# EAGLE board icetube_main_transistor_RevB (EAGLE 6.5.0)
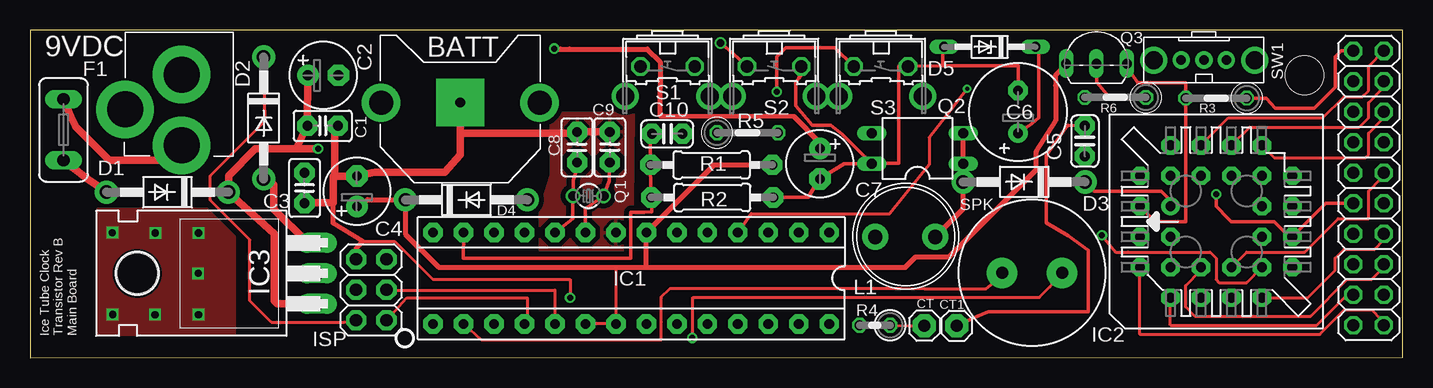
[diagram p0: board, top side]
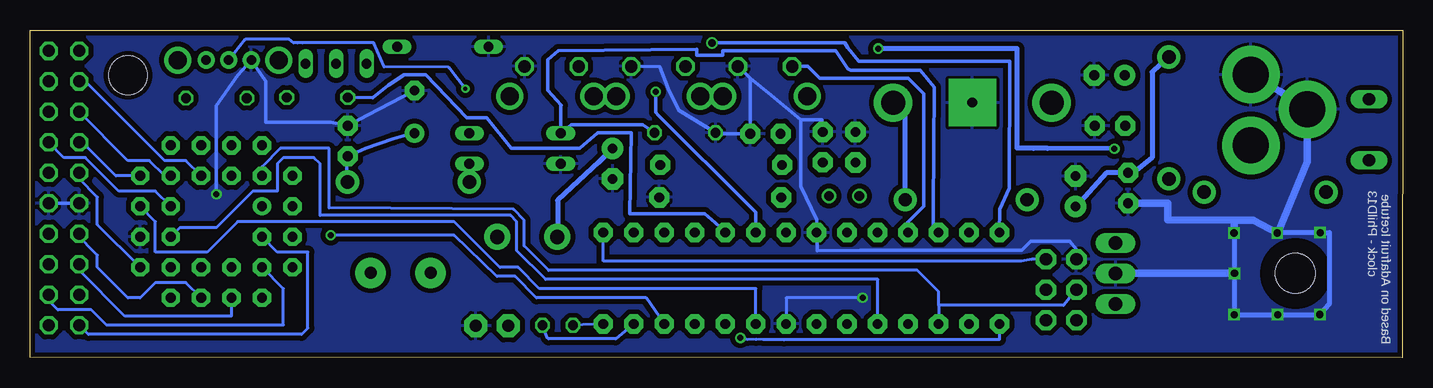
[diagram p1: board, bottom side, seen from below]

Size 114.38 x 27.33 mm. Coordinates in mm from the lower left corner, seen from the top.
Outline: 0.01,0 114.38,0.06
Outline: 114.38,0.06 114.38,27.33 0,27.33 0.01,0
Outline: 0.01,0 114.38,0.06
Copper layers (1*16): Top 0.0356mm / dielectric 1.5011mm / Bottom 0.0356mm
Design rules "osh_boards": minimum track width 6mil, minimum drill 13mil, track to track 6mil, track to pad 6mil, pad to pad 6mil, via to via 6mil, smd to smd 6mil, copper to edge 15mil, drill to drill 6mil, minimum pad ring 7mil, minimum via ring 7mil, stop-mask expansion 4mil, vias tented up to drill 0mil, thermal gap 10mil
Holes 3.2 mm at 106.21,23.56

## Footprints (pad centres in the part's own frame; a part is rotated, then mirrored left to right if it is on the bottom)
CR1220-THM = drill 2 pad 3.175: +1 -6.604,0; +2 6.604,0 | drill 0.8 pad 3.962 square: - 0,0
C025-025X050 = drill 0.813 pad 1.676 octagon: 1 -1.27,0; 2 1.27,0
E2,5-6 = drill 0.813 pad 1.778: + -1.27,0 | drill 0.813 pad 1.778 octagon: - 1.27,0
C025-024X044 = drill 0.813 pad 1.676 octagon: 1 -1.27,0; 2 1.27,0
E3,5-8 = drill 0.813 pad 1.6: + -1.778,0 | drill 0.813 pad 1.6 octagon: - 1.778,0
1X01 = drill 1.016 pad 1.93 octagon: 1 0,0
DO41-10 = drill 1.118 pad 1.93: A 5.08,0; C -5.08,0
DO34Z7 = drill 0.813 long: A 3.81,0; C -3.81,0
TE5 = drill 1.016 long: 1 -2.54,0; 2 2.54,0
DIL28/3 = drill 0.813 pad 1.6 octagon: 1 -16.51,-3.81; 2 -13.97,-3.81; 3 -11.43,-3.81; 4 -8.89,-3.81; 5 -6.35,-3.81; 6 -3.81,-3.81; 7 -1.27,-3.81; 8 1.27,-3.81; 9 3.81,-3.81; 10 6.35,-3.81; 11 8.89,-3.81; 12 11.43,-3.81; 13 13.97,-3.81; 14 16.51,-3.81; 15 16.51,3.81; 16 13.97,3.81; 17 11.43,3.81; 18 8.89,3.81; 19 6.35,3.81; 20 3.81,3.81; 21 1.27,3.81; 22 -1.27,3.81; 23 -3.81,3.81; 24 -6.35,3.81; 25 -8.89,3.81; 26 -11.43,3.81; 27 -13.97,3.81; 28 -16.51,3.81
PLCC-S28 = drill 0.813 pad 1.524: 1 1.27,3.81 | drill 0.813 pad 1.524 octagon: 2 -1.27,6.35; 3 -1.27,3.81; 4 -3.81,6.35; 5 -6.35,3.81; 6 -3.81,3.81; 7 -6.35,1.27; 8 -3.81,1.27; 9 -6.35,-1.27; 10 -3.81,-1.27; 11 -6.35,-3.81; 12 -3.81,-6.35; 13 -3.81,-3.81; 14 -1.27,-6.35; 15 -1.27,-3.81; 16 1.27,-6.35; 17 1.27,-3.81; 18 3.81,-6.35; 19 6.35,-3.81; 20 3.81,-3.81; 21 6.35,-1.27; 22 3.81,-1.27; 23 6.35,1.27; 24 3.81,1.27; 25 6.35,3.81; 26 3.81,6.35; 27 3.81,3.81; 28 1.27,6.35
TO220H = drill 1.118 long: 1 -2.54,-10.16; 2 0,-10.16; 3 2.54,-10.16 | hole 3.302: 0,4.826
2X03 = drill 1.016 pad 1.676 octagon: 1 -2.54,-1.27; 2 -2.54,1.27; 3 0,-1.27; 4 0,1.27; 5 2.54,-1.27; 6 2.54,1.27
PJ-102A = drill 3 pad 4.8: RING 0.1,-3.39; RING_SW -4.6,-6.29; TIP 0.1,-9.29
2X10 = drill 1.016 octagon: 1 -11.43,-1.27; 2 -11.43,1.27; 3 -8.89,-1.27; 4 -8.89,1.27; 5 -6.35,-1.27; 6 -6.35,1.27; 7 -3.81,-1.27; 8 -3.81,1.27; 9 -1.27,-1.27; 10 -1.27,1.27; 11 1.27,-1.27; 12 1.27,1.27; 13 3.81,-1.27; 14 3.81,1.27; 15 6.35,-1.27; 16 6.35,1.27; 17 8.89,-1.27; 18 8.89,1.27; 19 11.43,-1.27; 20 11.43,1.27
6000 = drill 1.2 pad 2.184: 1 -2.5,0; 2 2.5,0
TC26V = drill 0.813: 1 -1.27,0; 2 1.27,0
DIL04 = drill 0.813 long: 1 -1.27,-3.81; 2 1.27,-3.81; 3 1.27,3.81; 4 -1.27,3.81
TO92-EBC-OVAL = drill 0.813 long: B 0,-1.27; C 2.54,-1.27; E -2.54,-1.27
0207/10 = drill 0.813 pad 1.676 octagon: 1 -5.08,0; 2 5.08,0
0207/5V = drill 0.813 octagon: 1 -2.54,0; 2 2.54,0
0207/2V = drill 0.813 octagon: 1 -1.27,0; 2 1.27,0
B3F-31XX = drill 1.016 octagon: 1 -2.261,-1.245; 2 2.261,-1.245 | drill 1.499 pad 2.159: 3 -3.505,1.245; 4 3.505,1.245
PS12 = drill 1 pad 2.54: P$1 -2.5,0; P$2 2.5,0
OS102011MA1Q = drill 0.8 pad 1.422: 1 -1.873,0; 2 0,0; 3 1.9,0 | drill 1.5 pad 2.184: MT1 -4.227,0; MT2 4.2,0

## Placement (x,y rotation side)
BATT  CR1220  [CR1220-THM]  35.86,21.27 0 top
C1  0.1uF/50V  [C025-025X050]  24.39,19.34 0 top
C2  47uF/25V  [E2,5-6]  24.43,23.56 0 top
C3  0.1uF/50V  [C025-025X050]  22.87,14.16 270 top
C4  220uF/6V  [E2,5-6]  27.25,13.89 90 top
C5  0.1uF/100V  [C025-024X044]  87.9,18.07 90 top
C6  33uF/100V  [E3,5-8]  82.34,20.51 90 top
C7  47uF/25V  [E2,5-6]  65.83,16.19 270 top
C8  10pf  [C025-025X050]  45.59,17.56 90 top
C9  10pf  [C025-025X050]  48.31,17.56 90 top
C10  0.1uF/50V  [C025-024X044]  53.1,18.68 0 top
CT  PC4  [1X01]  74.52,2.69 0 top
CT1  GND  [1X01]  77.22,2.68 0 top
D1  SB160 60V/1A  [DO41-10]  11.45,13.81 180 top
D2  1N5817/20v  [DO41-10]  19.47,20 270 top
D3  SB160 60V/1A  [DO41-10]  82.85,14.67 180 top
D4  1N5817/20v  [DO41-10]  36.36,13.18 0 top
D5  1N5264B/60V  [DO34Z7]  79.97,25.92 180 top
F1  FUSETE5  [TE5]  2.79,19.01 270 top
IC1  ATMEGA328P  [DIL28/3]  50.1,6.64 180 top
IC2  MAX6921  [PLCC-S28]  98.85,11.36 90 top
IC3  7805T  [TO220H]  13.76,7.05 90 top
ISP  ISP  [2X03]  28.44,5.68 90 top
J1  2.1MMJACKTHM  [PJ-102A]  12.53,27.01 0 top
JP1  female  [2X10]  111.55,14.16 270 top
L1  2200uH  [6000]  72.94,10.09 0 top
Q1  32.768 khz  [TC26V]  46.53,13.5 0 top
Q2  IRFD110  [DIL04]  73.96,17.46 90 top
Q3  2N2907  [TO92-EBC-OVAL]  88.87,25.79 0 top
R1  270k  [0207/10]  56.79,16.09 180 top
R2  100k  [0207/10]  56.85,13.37 0 top
R3  11 ohm  [0207/5V]  98.85,21.65 180 top
R4  5.6K  [0207/2V]  70.4,2.73 180 top
R5  10k  [0207/5V]  59.79,18.76 0 top
R6  1K  [0207/5V]  90.44,21.71 180 top
S1  Menu  [B3F-31XX]  53.13,23.05 180 top
S2  Set  [B3F-31XX]  62.02,23.05 180 top
S3  +  [B3F-31XX]  70.91,23.05 180 top
SPK  PS1240  [PS12]  83.5,7.1 180 top
SW1  ALARM  [OS102011MA1Q]  97.83,24.83 180 top

## Library data of the parts
BATT D1 J1 Q3 SW1 = adafruit
C1-C4 C7-C9 R1 R2 = minimidi
C5 C6 C10 = rcl-ez
CT CT1 SPK = ybox2
D2-D4 L1 = usbbuck
D5 = diode
F1 = fuse; MF: .300A; OC_FARNELL: unknown; OC_NEWARK: unknown
IC1 = avr
IC2 Q2 = vfd
IC3 = linear
ISP = pinhead-ez
JP1 = pinhead
Q1 = crystal
R3-R6 = resistor
S1-S3 = switch-omron; MPN: B3F-3100; OC_FARNELL: 959704; OC_NEWARK: 36M3582

## Nets
+9V: C1.1 C2.+ C7.+ D1.C IC3.1 L1.1
+UB: C5.1 C6.+ D3.C D5.C IC2.1
ALARM: IC1.4 SW1.2
BATTSNS: C10.1 IC1.13 R1.2 R2.1
BLANK: IC1.26 IC2.13
BOOST: IC1.12 Q2.3 R5.2
GND: BATT.- C1.2 C2.- C3.2 C4.- C5.2 C6.- C7.- C8.2 C9.2 C10.2 CT1.1 D5.A IC1.8 IC1.22 IC2.14 IC3.2 ISP.6 J1.RING J1.RING_SW JP1.11 JP1.12 Q2.4 R2.2 R5.1 S1.1 S2.1 S3.1 SW1.3
LOAD: IC1.23 IC2.16
MISO: IC1.18 ISP.1
MOSI: IC1.17 IC2.27 ISP.4
N$1: C9.1 IC1.9 Q1.2
N$2: D3.A L1.2 Q2.1 Q2.2
N$3: C8.1 IC1.10 Q1.1
N$4: F1.1 J1.TIP
N$5: D1.A F1.2
N$6: Q3.B R6.1
N$10: BATT.+2 D4.A
N$11: IC1.28 R4.2
N$34: JP1.1 R3.1
N$39: IC2.28 Q3.C R3.2
N$52: CT.1 IC1.27 R4.1
N$53: D2.A IC3.3
RST: IC1.1 ISP.5
SCK: IC1.19 IC2.15 ISP.3
SPKR1: IC1.15 SPK.P$1
SPKR2: IC1.16 SPK.P$2
SWITCH1: IC1.11 S1.2
SWITCH2: IC1.14 S2.2
SWITCH3: IC1.6 S3.2
VCC: C3.1 C4.+ D2.C D4.C IC1.7 IC1.20 IC1.21 ISP.2 Q3.E R1.1
VFD'1: IC2.22 JP1.3
VFD'2: IC2.10 JP1.10
VFD'3: IC2.21 JP1.4
VFD'4: IC2.12 JP1.9
VFD'5: IC2.20 JP1.5
VFD'6: IC2.17 JP1.8
VFD'7: IC2.18 JP1.7
VFD'8: IC2.19 JP1.6
VFD'9: IC2.23 JP1.2
VFD'_A: IC2.3 JP1.19
VFD'_B: IC2.5 JP1.17
VFD'_C: IC2.8 JP1.16
VFD'_D: IC2.9 JP1.13
VFD'_E: IC2.7 JP1.15
VFD'_F: IC2.4 JP1.20
VFD'_G: IC2.6 JP1.18
VFD'_H: IC2.11 JP1.14
VFDPWR: IC1.5 R6.2

## Tracks (layer width: path | path; a pad name or v marks a point on that pad's centre or on a via)
+9V  (via drill 0.5)
  Top 0.406: 43.68,25.97 43.68,25.74 | 43.68,25.74 44.19,25.74 | 44.19,25.74 44.95,25.74 51.46,25.73 52.51,24.66 52.49,20.19 63.65,20.13 65.78,17.99 65.78,17.49 65.81,17.46 C7.+ | v43.68,25.78 43.68,25.74 | 43.68,25.74 44.19,25.74
  Top 0.61: C2.+ C1.1 22.21,17.44 | 22.21,17.44 23.39,17.44 v24.01,17.43 | IC3.1 20.62,4.51 20.36,4.76 20.36,10.35 D1.C 16.55,15.18 18.75,17.42 22.21,17.44
  Bottom 0.254: 70.4,10.1 L1.1
  Bottom 0.406: C7.+ 66.35,16.92 66.92,16.34 70.4,13.12 70.4,10.1 | v24.01,17.43 29.59,17.47 30.76,17.47 32.12,17.49 32.13,18.63 32.13,25.78 v43.68,25.78
+UB
  Top 0.305: D3.C 88.69,13.91 94.28,13.91 95.04,13.14 IC2.1 | D5.C 84.07,25.35 84.07,20.03 83.48,19.52 C6.+
  Bottom 0.254: 88.05,14.54 D3.C 87.98,15.24
  Bottom 0.305: 87.9,14.66 87.98,15.24 87.97,15.93 C5.1 86.4,17.46 84.09,18.25 82.36,18.76 C6.+
ALARM  (via drill 0.33)
  Top 0.254: 60.11,12 64.89,12 65.46,12 71.64,12 74.93,16.09 74.93,18.37 76.72,20.66 v78.09,22.43
  Top 0.305: IC1.4 60.11,12
  Bottom 0.254: SW1.2 96.43,26.55 92.77,26.54 92.4,26.25 92.08,26.25 91.69,26.25 85.72,26.27 84.86,24.25 79.5,24.22 78.99,23.58 v78.09,22.43
BATTSNS
  Top 0.152: 50.08,12.15 50.08,12.13
  Top 0.305: 50.08,12.13 50.08,8.32 36.11,8.32 IC1.13 | 50.08,12.15 51.18,12.15 51.79,12.16 R2.1 51.71,15.68 R1.2 51.71,18.3 C10.1
BLANK  (via drill 0.5)
  Top 0.254: IC2.13 101.39,6.29 99.1,6.29 98.85,6.54 98.85,8.32 98.34,8.83 91.48,8.83 90.47,8.83 89.96,9.46 v89.32,10.22
  Bottom 0.254: IC1.26 63.03,5.02 72.18,5.02 73.96,6.79 75.48,6.79 79.04,10.22 v89.32,10.22
BOOST
  Bottom 0.152: 70.1,21.04 70.15,21.04
  Bottom 0.305: IC1.12 39.11,10.45 39.11,12.41 39.03,22.54 40.2,23.96 45.97,23.96 46.22,24.09 47.24,25.61 56.64,25.61 56.64,25.23 58.8,25.23 58.8,25.74 70.35,25.61 71.24,24.85 71.24,22.31 70.1,21.04 | R5.2 63.32,19.41 67.92,19.41 69.26,19.41 Q2.3 70.15,21.04
GND  (via drill 0.5, 0.6)
  Top 0.152: 25.39,15.16 25.27,15.16 | 22.87,12.91 C3.2 | 70.15,16.22 Q2.4 | 45.59,18.73 C8.2
  Top 0.254: 64.3,24.29 S2.1 64.25,24.32 | v45,5.02 45,6.54 33.57,6.54 30.39,9.71 27.73,9.71
  Top 0.305: JP1.11 107.99,12.89 IC2.14 104.94,10.1 103.67,11.37 100.12,11.37 99.86,11.62 98.85,12.64 v98.85,13.65 | 64.25,24.32 64.26,23.62 64.05,23.3 63.8,22.92 63.8,21.02 65.2,19.41 66.73,19.41 67.7,18.64 Q2.4 67.86,16.19 C7.- 65.81,14.92 65.78,14.95 64.85,13.38 R2.2 | CT1.1 78.86,3.44 79.83,3.83 88.18,3.84 88.2,8.96 86.54,10.16 84.7,11.26 84.7,16.85 85.41,17.9 86.48,19.39 C5.2 | 76.07,24.34 75.95,24.34 S3.1 72.39,24.29 72.39,16.22 70.15,16.22 | 76.07,24.34 82.34,24.34 C6.- | D5.A 76.07,25.22 76.07,24.34
  Top 0.406: ISP.6 27.16,9.05 27.73,9.71 25.27,11.24 25.27,12.91 | 35.86,18.5 35.86,18.73 BATT.-
  Top 0.61: 25.27,15.16 25.27,12.91 22.87,12.91 | C1.2 25.39,18.6 25.39,15.16 C4.- 28.49,15.43 28.77,15.49 34.56,15.47 35.86,16.95 35.86,18.5 35.86,18.73 | 35.86,18.73 BATT.- | 35.86,18.73 45.59,18.73 | C9.2 C8.2
  Bottom 0.152: C10.2 | 57.25,18.68 R5.1 | v14.04,10.42 14.01,10.42 | v14.01,7.05 14.03,7.05 | v10.41,3.6 v10.41,3.61 | 6.89,3.61 v6.89,3.62 | v6.86,10.43 6.89,10.43 | 10.44,10.43 v10.44,10.42
  Bottom 0.254: v45,5.02 51.37,5.02 IC1.22
  Bottom 0.305: 113.07,12.89 JP1.12 JP1.11 | v98.85,13.65 98.85,21.02 97.07,23.56 SW1.3 94.74,23.05 94.74,19.65 93.34,19.65 91.44,19.65 89.31,19.65 C5.2 86.28,20.24 C6.- | 50.16,19.85 50.16,14.31 48.83,11.52 IC1.8 48.76,8.93 45.21,8.98 31.75,8.98 30.98,9.74 28.57,9.74 27.71,9.74 27.17,9.06 ISP.6 | 50.16,19.85 52.59,21.88 54.37,23.32 | 54.37,23.32 S1.1 | C10.2 54.37,23.32 | C10.2 57.25,18.68 | R5.1 60.32,20.66 61.21,22.45 61.9,24.28 S2.1 | 50.16,19.85 48.38,19.85 48.38,18.88
  Bottom 0.406: 14.01,10.42 v14.01,7.05 | 14.03,7.05 v14.03,3.6 v10.41,3.6 | v10.41,3.61 6.89,3.61 | v6.89,3.62 6.09,4.53 6.09,8.85 6.09,10.43 6.89,10.43 10.44,10.43
  Bottom 0.61: C3.2 19.55,12.89 19.55,11.52 14.04,11.49 | 14.04,11.49 v14.04,10.42 | 14.04,11.49 12.44,11.49 10.41,10.37 7.93,16.34 J1.RING_SW 10.22,22.24 J1.RING | IC3.2 v14.01,7.05
  pour Bottom (isolate 0.406): 0.14,27.49 0.01,0.19 114.46,0.24 114.46,27.42
  pour Top: 5.63,12.38 5.63,1.97 17.06,1.97 17.06,10.09 14.77,12.38
  pour Top (isolate 0.406): 43.43,20.41 43.43,15.2 42.54,12.28 42.54,8.98 50.16,8.85 50.29,20.41
LOAD
  Bottom 0.254: 105.45,12.89 IC2.16 103.93,11.37 103.93,8.83 99.61,8.83 97.07,11.37 79.04,11.37 75.23,7.56 73.7,7.56 71.92,5.78 53.89,5.78 IC1.23
MISO
  Top 0.254: IC1.18 41.44,3.49 41.44,5.02 31.4,5.02 ISP.1
MOSI
  Bottom 0.254: 38.65,4.38 IC1.17 | 38.65,4.38 38.65,5.52 40.43,7.3 71.16,7.3 73.19,9.33 73.19,11.49 74.08,12.38 89.45,12.51 89.45,17.46 93.51,17.46 95.04,15.94 IC2.27 | ISP.4 28.24,4.38 38.65,4.38
N$1
  Top 0.305: IC1.9 46.27,12.45 47.47,13.27 Q1.2 48.28,14.76 48.25,16.22 48.28,16.19 C9.1
N$2
  Top 0.406: L1.2 77.77,12.42 D3.A Q2.1 Q2.2
N$3
  Top 0.305: C8.1 45.59,15.97 45.57,15.72 45.28,14.79 Q1.1 45.24,12.82 45.22,12.34 45.23,11.58 IC1.10
N$4
  Top 0.61: J1.TIP 12,16.47 6.6,16.47 3.81,19.26 3.41,20.15 3.18,20.66 3.01,21.04 F1.1
N$5
  Top 0.61: D1.A 5.9,14.18 4.95,14.82 F1.2
N$6
  Top 0.305: Q3.B 88.89,23 89.92,21.72 91.51,21.72 R6.1
N$10
  Bottom 0.406: BATT.+2 41.44,21.27 D4.A
N$11
  Bottom 0.254: IC1.28 R4.2
N$34
  Top 0.305: JP1.1 109.26,25.59 108.75,25.08 108.75,22.54 107,20.79 103.78,20.8 103.4,21.21 103.03,21.63 102.25,21.63 R3.1
N$39
  Top 0.152: R3.2 96.31,21.42
  Top 0.305: 96.31,21.04 96.31,11.37 93.77,11.37 IC2.28 | 96.31,21.04 96.31,21.27 | Q3.C 91.77,23.73 92.32,22.95 96.31,22.95 R3.2 96.31,21.42 96.31,21.04
N$52
  Top 0.254: R4.1 73.21,2.67 CT.1
  Bottom 0.254: IC1.27 65.57,1.59 71.16,1.59 71.28,1.7 R4.1
N$53
  Top 0.61: IC3.3 23.13,9.59 20.32,12.41 20.32,14.44 19.6,15.15 D2.A
RST
  Bottom 0.254: 66.59,10.86 66.59,10.6 | 66.59,10.86 IC1.1 | 66.59,10.86 66.59,8.06 31.79,8.06 30.91,8.21 ISP.5
SCK
  Top 0.254: IC1.19 43.73,5.65 29.76,5.65 ISP.3
  Bottom 0.254: IC1.19 43.73,6.54 71.42,6.54 73.83,8.95 73.83,11.37 74.34,11.87 90.21,11.87 90.21,12.38 90.21,16.19 90.72,16.7 93.26,16.7 93.77,16.19 93.77,13.91 95.8,13.91 98.85,10.86 101.9,10.86 IC2.15
SPKR1  (via drill 0.5)
  Top 0.254: v55.18,1.67 55.24,1.67 55.24,5.04 73.4,5.04 75.05,5.04 84.12,5.04 84.99,5.93 SPK.P$1
  Bottom 0.254: IC1.15 33.59,2.23 33.59,1.54 51.53,1.51 53.29,1.53 53.88,1.54 54.58,1.54 v55.18,1.67
SPKR2
  Top 0.254: IC1.16 37.61,1.51 52.6,1.51 52.62,2.98 52.62,5.02 52.6,5.02 52.57,5.04 53.34,5.8 72.64,5.8 74.52,5.78 79.67,5.78 80.62,6.49 SPK.P$2
SWITCH1
  Bottom 0.305: 41.19,11.37 39.92,12.64 39.92,22.03 41.19,23.3 48.56,23.3 49.55,24.29 S1.2 | IC1.11 41.19,11.37 | 41.19,11.37 41.44,11.11
SWITCH2  (via drill 0.6)
  Top 0.305: v57.55,26.25 S2.2
  Bottom 0.305: IC1.14 33.57,12.38 32.79,14.16 32.72,24.3 32.72,24.73 45.33,24.73 46.22,25.87 46.48,26.25 v57.55,26.25
SWITCH3  (via drill 0.5)
  Top 0.305: S3.2 67.07,25.87 62.99,25.87 62.22,25.11 v62.22,22.19
  Bottom 0.305: IC1.6 53.89,12.13 54.4,12.64 62.01,20.24 62.22,20.46 v62.22,22.19
VCC
  Top 0.254: IC1.20 IC1.21 48.81,7.56 | ISP.2 26.2,2.98 20.11,2.98 18.33,4.76 18.33,9.84 15.03,13.14 15.03,15.18 19.6,19.75 D2.C
  Top 0.305: 34.08,7.56 34.06,7.56 34.03,7.58
  Top 0.406: 51.35,7.56 IC1.7 57.01,16.1 R1.1 | 51.35,7.56 48.81,7.56 34.08,7.56 | 51.35,7.56 67.99,7.56 68.88,7.56 69.89,7.56 72.94,7.56 73.81,8.41 76.01,8.41 76.62,8.44 83.86,15.68 83.86,17.21 85.47,19.77 85.47,22.69 85.45,23.54 Q3.E | 34.03,7.58 31.28,10.33 D4.C 28.12,13.19 C4.+
  Bottom 0.254: 51.42,10.51 51.37,10.55
  Bottom 0.406: IC1.7 51.42,10.51 | C4.+ 24.68,15.43 C3.1 22.39,15.43 20.87,16.7 20.87,23.81 D2.C
VFD'1
  Bottom 0.254: IC2.22 101.39,16.45 103.17,16.45 109.77,23.05 JP1.3
VFD'2
  Top 0.254: IC2.10 101.39,8.83 106.21,8.83 109.01,11.62 111.55,11.62 111.55,13.91 112.56,14.92 112.56,15.43 JP1.10
VFD'3
  Top 0.254: IC2.21 101.64,19.24 110.79,19.24 111.55,20 111.55,21.27 112.82,22.54 JP1.4
VFD'4
  Bottom 0.254: IC2.12 108.75,11.11 108.75,13.4 110.28,14.92 JP1.9
VFD'5
  Bottom 0.254: JP1.5 106.21,16.45 104.44,16.45 103.17,15.18 IC2.20
VFD'6
  Bottom 0.254: IC2.17 103.93,13.91 106.98,13.91 109.77,16.7 111.55,16.7 JP1.8 113.07,17.97
VFD'7
  Bottom 0.254: IC2.18 107.23,15.18 110.02,17.97 JP1.7
VFD'8
  Top 0.254: IC2.19 103.67,16.7 111.29,16.7 111.55,16.95 111.55,18.73 112.82,20 JP1.6
VFD'9
  Top 0.254: IC2.23 99.86,20 107.74,20 109.52,21.78 111.04,21.78 111.55,22.29 111.55,24.32 JP1.2
VFD'_A
  Bottom 0.254: JP1.19 109.52,1.97 91.74,1.97 91.23,2.48 91.23,8.83 93.77,8.83 IC2.3
VFD'_B
  Top 0.254: IC2.5 95.04,2.73 107.23,2.73 109.77,5.27 JP1.17
VFD'_C
  Top 0.254: IC2.8 97.58,7.3 96.31,6.03 96.31,4.25 97.07,3.49 106.72,3.49 109.77,6.54 111.8,6.54 112.82,7.56 JP1.16
VFD'_D
  Bottom 0.254: IC2.9 101.39,6.29 103.93,6.29 105.2,5.02 106.21,5.02 108.75,7.56 108.75,8.57 110.53,10.35 JP1.13
VFD'_E
  Bottom 0.254: IC2.7 97.58,3.49 106.47,3.49 110.28,7.3 JP1.15
VFD'_F
  Top 0.254: IC2.4 92.5,1.97 107.48,1.97 109.52,4 111.8,4 112.56,3.24 112.56,2.98 JP1.20
VFD'_G
  Bottom 0.254: IC2.6 93.26,5.78 93.26,2.73 107.99,2.73 109.26,4 112.06,4 112.82,4.76 JP1.18
VFD'_H
  Top 0.254: IC2.11 106.47,5.02 108.75,7.3 108.75,8.32 109.52,9.08 112.06,9.08 112.82,9.84 JP1.14
VFDPWR
  Bottom 0.305: IC1.5 56.41,10.48 57.27,11.26 58.14,12 58.21,12 64.42,12 64.29,18.78 67.08,18.78 68.58,17.49 74.29,17.49 76.32,20.03 77.97,20.03 81.39,23.6 83.17,23.6 84.54,22.72 85.81,21.68 R6.2

## Text on the board
tPlace: 9VDC | Ice Tube Clock / Transistor Rev B / Main Board
bPlace: Based on Adafruit Icetube / clock - PhilD13